# Altium PCB Percepção_Externa.PcbDoc
Units mm, origin at the board's own origin, x right, y up, seen from the top; angles counter-clockwise.
Board outline 65.15 x 120.02 mm, 2 copper layers (Top Layer, Bottom Layer); 28 components, 24 nets, 141 pads, 28 vias.
Unrouted connection lines stored in the file: 1.
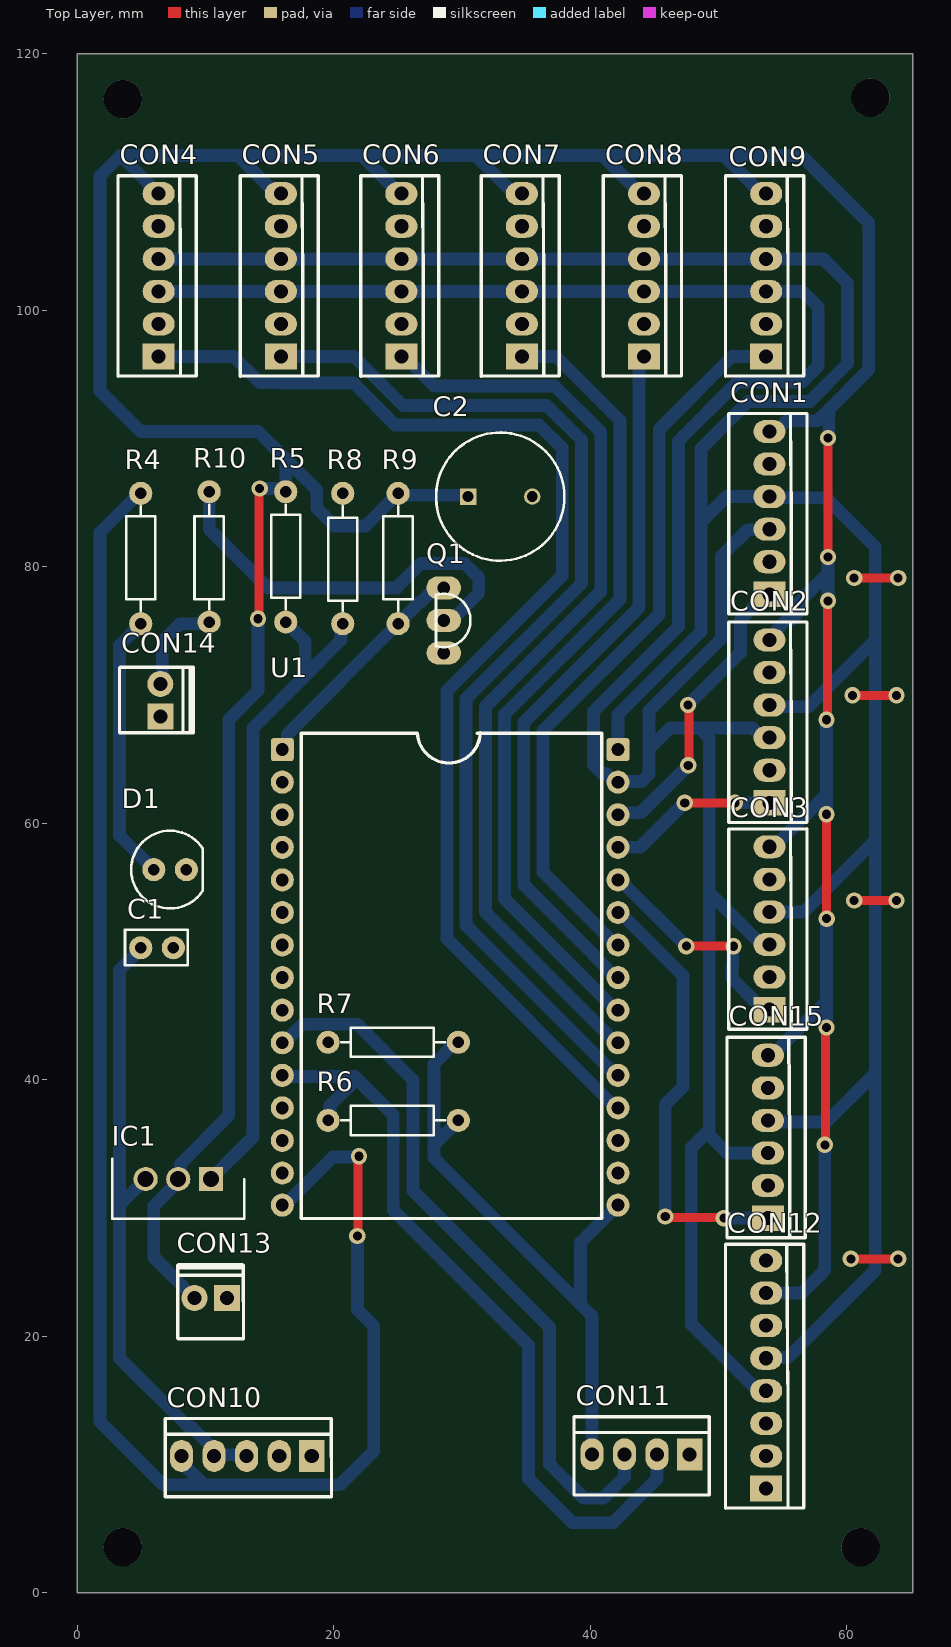
[diagram p0: Top Layer view]
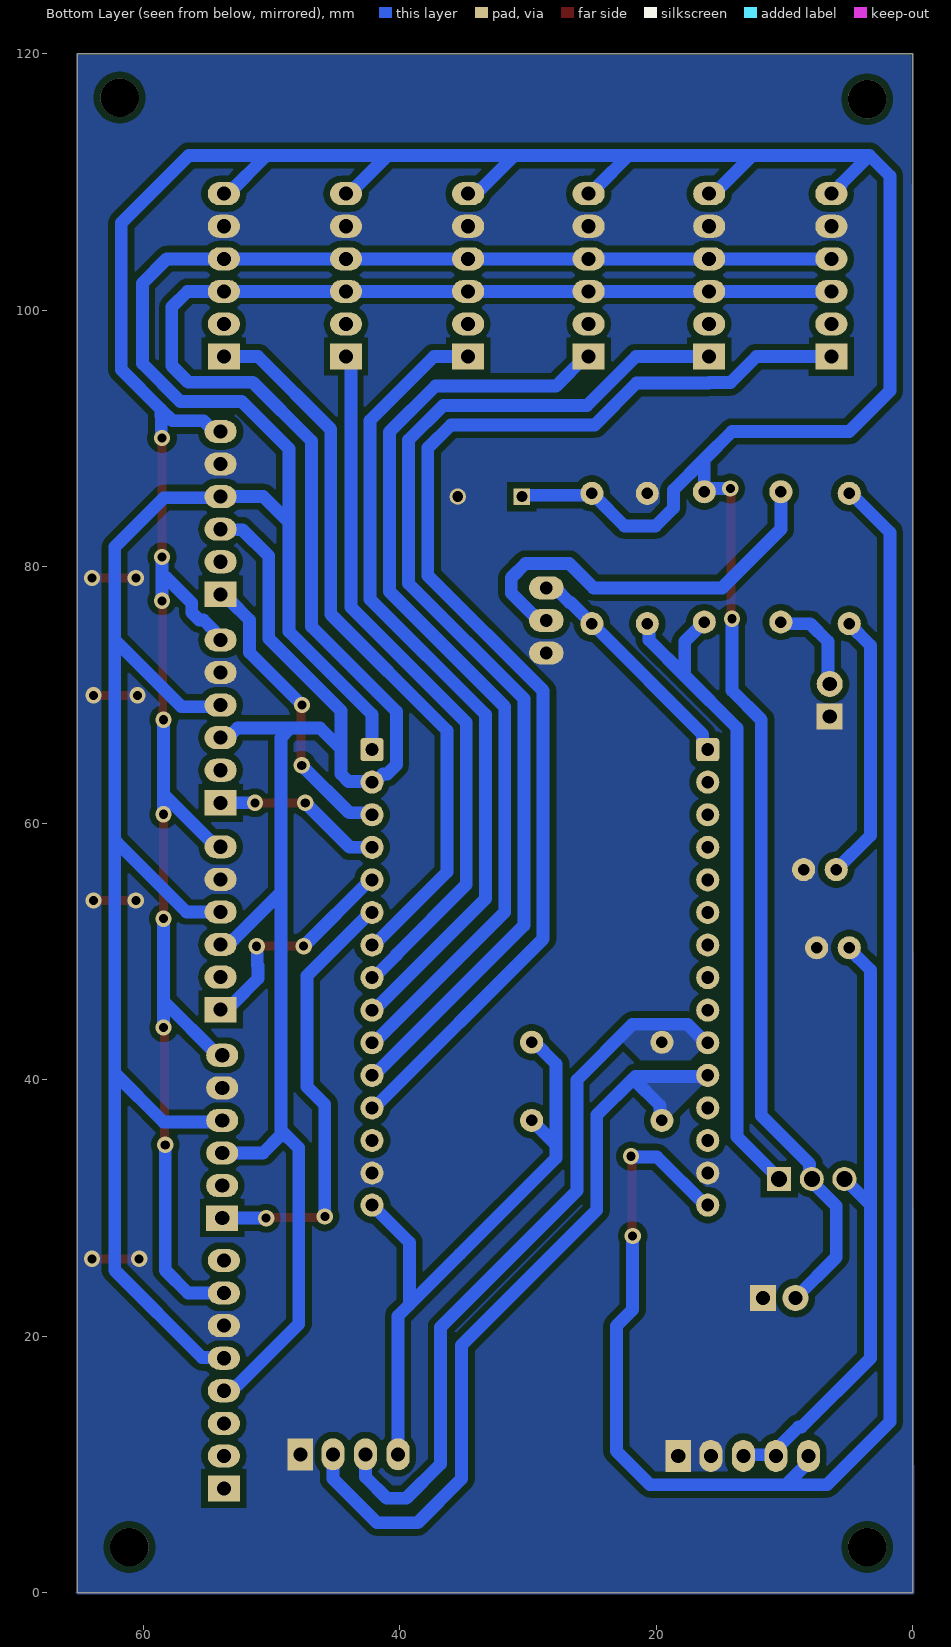
[diagram p1: Bottom Layer view, seen from below]

## Layer stack, top to bottom
Top Solder: solder mask 0.0102, Solder Resist, Dk 3.5
Top Layer: signal copper 0.0356
Dielectric 1: dielectric 0.32, FR-4, Dk 4.8
Bottom Layer: signal copper 0.0356
Bottom Solder: solder mask 0.0102, Solder Resist, Dk 3.5

## Board outline
0,0 65.151,0 65.151,120.015 0,120.015

## Design rules (kind name [scope] priority, off if disabled: settings)
Clearance [All] p1: gap=0.5 ignorepadtopadclearanceinfootprint=FALSE except(0: Arc-Text Arc-Hole Track-Text Track-Hole SMDPad-Text SMDPad-Hole THPad-Text THPad-Hole Via-Text Via-Hole Fill-Text Fill-Hole Poly-Text Poly-Hole Region-Text Region-Hole Text-Text Text-Hole)
ComponentClearance [All] p1: gap=0.3 collisioncheckmode=3 verticalgap=0.254 showdistances=FALSE
HoleSize [All] p1: absolutevalues=TRUE maxlimit=3 minlimit=0.75 maxpercent=80.000 minpercent=20.000
HoleToHoleClearance [All] p1: gap=0.1 allowstackedmicrovias=TRUE
MinimumSolderMaskSliver [All] p1: minsoldermaskwidth=0.05
PolygonConnect [All] p1: connectstyle=Relief reliefconductorwidth=0.254 reliefentries=4 polygonreliefangle="90 Angle" airgapwidth=0.254
RoutingVias [All] p1: holewidth=0.9 width=2 viastyle="Through Hole" minholewidth=0.9 minwidth=2 maxholewidth=0.9 maxwidth=2
SilkToSilkClearance [All] p1: silktosilkclearance=0
SilkToSolderMaskClearance [IsPad] p1: minsilkscreentomaskgap=0 clearancetoexposedcopper=TRUE
SolderMaskExpansion [All] p1: expansion=0.102 istentingtop=FALSE
Width [All] p1: maxlimit=1.2 minlimit=0.5 preferedwidth=0.7 minimp=50.000000 maximp=50.000000 favimp=50.000000
24 further rules are at their usual default settings.

## Classes and differential pairs
component class U_sensores: CON1 CON2 CON3 CON4 CON5 CON6 CON7 CON8 CON9 CON15
component class Percepção_Externa: C1 C2 CON10 CON11 CON12 CON13 CON14 D1 IC1 Q1 R4 R5 R6 R7 R8 R9 R10 U1

## Components (designator, comment, footprint, x,y, rotation, side; value= is the part's Value field where it differs from the comment)
C1 "100nF" "CAP CER DISK 100NF 50V" 6.223,50.292 r180 top
C2 "Cap. Elet. 1uF 50V" "Cap. Elet. 470uF 16V" 30.48,85.471 r0 top
CON1 "KK_2.54_6vias" KK_6vias_180° 53.975,77.851 r90 top
CON2 "KK_2.54_6vias" KK_6vias_180° 53.975,61.595 r90 top
CON3 "KK_2.54_6vias" KK_6vias_180° 53.975,45.466 r90 top
CON4 "KK_2.54_6vias" KK_6vias_180° 6.35,96.393 r90 top
CON5 "KK_2.54_6vias" KK_6vias_180° 15.875,96.393 r90 top
CON6 "KK_2.54_6vias" KK_6vias_180° 25.273,96.393 r90 top
CON7 "KK_2.54_6vias" KK_6vias_180° 34.671,96.393 r90 top
CON8 "KK_2.54_6vias" KK_6vias_180° 44.196,96.393 r90 top
CON9 "KK_2.54_6vias" KK_6vias_180° 53.721,96.393 r90 top
CON10 "KK_2.54_5vias" KK_5vias_180° 18.288,10.668 r180 top
CON11 "KK_2.54_4vias" KK_4vias_180° 47.752,10.795 r180 top
CON12 "KK_2.54_8vias" KK_8vias_180° 53.721,8.128 r90 top
CON13 "KK_2.54_2vias" KK_2VIAS_180º 11.684,22.987 r180 top
CON14 "KK_2.54_2vias" KK_2VIAS_180º 6.477,68.326 r90 top
CON15 "KK_2.54_6vias" KK_6vias_180° 53.848,29.21 r90 top
D1 "LED 5MM RED" "LED 5MM RED" 7.239,56.388 r0 top
IC1 "LM317" TO254P467X1016X1971-3P 10.414,32.258 r180 top
Q1 "BC549" TO92 28.575,75.819 r270 top
R4 "RES 470R 1/4W CARBON FILM" "RES 470R 1/4W CARBON FILM" 4.953,80.645 r90 top
R5 "RES 470R 1/4W CARBON FILM" "RES 470R 1/4W CARBON FILM" 16.256,80.772 r90 top
R6 "4.7K" "RES 4.7K 1/4W CARBON FILM" 24.638,36.83 r180 top
R7 "4.7K" "RES 4.7K 1/4W CARBON FILM" 24.638,42.926 r180 top
R8 "RES 470R 1/4W CARBON FILM" "RES 470R 1/4W CARBON FILM" 20.701,80.645 r270 top
R9 "RES 470R 1/4W CARBON FILM" "RES 470R 1/4W CARBON FILM" 25.019,80.645 r90 top
R10 "RES 470R 1/4W CARBON FILM" "RES 470R 1/4W CARBON FILM" 10.287,80.772 r270 top
U1 "microcontrolador" ESP32_Desvikit_v1 15.989,65.746 r0 top value="ESP32 Desvikit V1"

## Footprints (in the part's own frame and the unit in brackets; to place one, negate y for a bottom-side part, rotate by r counter-clockwise, add the part's x,y. Pads: shape width x height; smd on the part's side, far side on the other; paste and mask are expansions set on the pad)
"CAP CER DISK 100NF 50V" [mm] "Connector; Header; 5 Position"
  round 1.8 hole 0.9: 1(-1.27,0) 2(1.27,0)
  silkscreen extent -2.4,-1.4 2.5,1.37, body extent -2.28,-1.25 2.42,1.25, height 6.1
"Cap. Elet. 470uF 16V" [mm]
  rect 1.275x1.275 hole 0.85: 1(0,0)
  round 1.275 hole 0.85: 2(5,0)
  silkscreen extent -2.5,-5 7.5,5, body extent -2.75,-5.25 7.75,5.25, height 13
ESP32_Desvikit_v1 [mm]
  rrect25% 1.8x1.8 hole 1: 1(0,0) 30(26.175,0)
  round 1.8 hole 1: 2(0,-2.54) 3(0,-5.08) 4(0,-7.62) 5(0,-10.16) 6(0,-12.7) 7(0,-15.24) 8(0,-17.78) 9(0,-20.32) 10(0,-22.86) 11(0,-25.4) 12(0,-27.94) 13(0,-30.48) 14(0,-33.02) 15(0,-35.52) 16(26.175,-35.52) 17(26.175,-33.02) 18(26.175,-30.48) 19(26.175,-27.94) 20(26.175,-25.4) 21(26.175,-22.86) 22(26.175,-20.32) 23(26.175,-17.78) 24(26.175,-15.24) 25(26.175,-12.7) 26(26.175,-10.16) 27(26.175,-7.62) 28(26.175,-5.08) 29(26.175,-2.54)
  silkscreen extent 1.47,-36.57 24.9,1.31, body extent -1.2,-46.07 27.48,4.86, height 16.2
KK_2VIAS_180º [mil]
  rect 80x80 hole 43.31: 1(0,0)
  round 80 hole 43.31: 2(100,0)
  silkscreen extent -50,-101 151,125, body extent -61,-108 165,128, height 464
KK_4vias_180° [mm]
  rect 2x2.5 hole 1.1: 1(0,0)
  oval 1.8x2.5 hole 1.1: 2(2.54,0) 3(5.08,0) 4(7.62,0)
  silkscreen extent -1.53,-2.92 9.02,3.18, body extent -1.4,-2.79 8.76,3.01, height 10.12
KK_5vias_180° [mm]
  rect 2x2.5 hole 1.1: 1(0,0)
  oval 1.8x2.5 hole 1.1: 2(2.54,0) 3(5.08,0) 4(7.62,0) 5(10.16,0)
  silkscreen extent -1.53,-2.92 11.43,3.18, body extent -1.4,-2.79 11.3,3.01, height 10.12
KK_6vias_180° [mm]
  rect 2x2.5 hole 1.1: 1(0,0)
  oval 1.8x2.5 hole 1.1: 2(2.54,0) 3(5.08,0) 4(7.62,0) 5(10.16,0) 6(12.7,0)
  silkscreen extent -1.53,-2.92 14.11,3.18, body extent -1.4,-2.79 13.84,3.05, height 10.1
KK_8vias_180° [mm]
  rect 2x2.5 hole 1.1: 1(0,0)
  oval 1.8x2.5 hole 1.1: 2(2.54,0) 3(5.08,0) 4(7.62,0) 5(10.16,0) 6(12.7,0) 7(15.24,0) 8(17.78,0)
  silkscreen extent -1.53,-2.92 19.05,3.18, body extent -1.4,-2.74 18.92,3.1, height 10.1
"LED 5MM RED" [mm]
  round 1.8 hole 0.9: 1(-1.27,0) 2(1.27,0)
  silkscreen extent -3.03,-3.03 2.54,3.03, body extent -2.98,-3.01 2.44,3.01, height 9.31
"RES 4.7K 1/4W CARBON FILM" [mm]
  round 1.8 hole 0.9: 1(-5.08,0) 2(5.08,0)
  silkscreen extent -4.06,-1.14 4.06,1.14, body extent -5.47,-1.27 5.47,1.27, height 3.27
"RES 470R 1/4W CARBON FILM" [mm]
  round 1.8 hole 0.9: 1(-5.08,0) 2(5.08,0)
  silkscreen extent -4.06,-1.14 4.06,1.14, body extent -5.47,-1.27 5.47,1.27, height 3.27
TO92 [mm]
  oval 1.8x2.7 hole 1: 1(-2.54,0) 2(0,0) 3(2.54,0)
  silkscreen extent -2.09,-0.6 2.09,2.08, body extent -2.74,-0.57 2.74,2.04, height 6.83
TO254P467X1016X1971-3P [mm]
  rect 1.875x1.875 hole 1.25: 1(0,0)
  round 1.875 hole 1.25: 2(2.54,0) 3(5.08,0)
  silkscreen extent -2.62,-1.59 7.7,3.09, body extent 0,0 0,0

## Part data
C1: library part "CAP CER DISK 100NF 50V", "CAP CER DISK 100NF 50V", Capacitance=0.1uF, Capacitance Tolerance="+80%, -20%", Capacitor Terminals="Radial Leaded", Dielectric Characteristic=Y5, Manufacturer=-, Manufacturer Part Number=IMP14925, Operating Temperature Max=85, Operating Temperature Min=-25, Operating Temperature Range="-25°C to +85°C<!--FANDB--><div class=\"features-and-benefits-container\"><div class=\"features-and-benefits-description\"><span class=\"features-benefits-value\">The MCFY series from Multicomp are radial leaded ceramic disc capacitors. The capacitance values ranges from 6800pF to 0.22?F.</span></div><div class=\"features-and-benefits-list\"><ul class=\"features-and-benefits-list-list\"><li class=\"features-and-benefits-list-item\">Large capacitance in small size</li><li class=\"features-and-benefits-list-item\">Rated voltage of 50V</li><li class=\"features-and-benefits-list-item\">80%/-20% tolerance</li><li class=\"features-and-benefits-list-item\">Operating temperature range -25°C to +85", Supplier Part Number 1="Capacitor Cerâmico Disco 100Kpf/50V (104/100K/100nF/0.1uF) cód. 1351", Voltage Rating=50, Capacitance Tolerance ±="+80%, -20%", ComponentLink1Description=http://loja.multcomercial.com.br/capacitor-ceramico-disco-100kpf-50v-104-100k-100nf-0-1uf-cod-1351.html, ComponentLink1URL=http://loja.multcomercial.com.br/capacitor-ceramico-disco-100kpf-50v-104-100k-100nf-0-1uf-cod-1351.html, Lead Spacing=5, Packaging=Each, Pricing 1="1=0.10 (BRL)", Product Range="MCFY Series", RoHS=YES, Stock 1=115809, Supplier 1="Mult Comercial", SVHC="No SVHC (15-Jun-2015)"
C2: library part "Cap. Elet. 470 uF 16V", "Aluminum Organic Polymer Capacitors 16volts 470uF ESR 10mohm", Arrow Part Number=16SEPC470M, Manufacturer_Name=Panasonic, Mouser Part Number=667-16SEPC470M, Arrow Price/Stock=https://www.arrow.com/en/products/16sepc470m/panasonic, Datasheet Link=http://industrial.panasonic.com/www-cgi/jvcr13pz.cgi?E+CI+4+AAB8010+16SEPC470M+8+WW, Height=13mm, Manufacturer_Part_Number=16SEPC470M, Mouser Price/Stock=https://www.mouser.co.uk/ProductDetail/Panasonic/16SEPC470M?qs=OE1iw1LrrPEdZuWyF2l%252B5w%3D%3D
CON1 CON2 CON3 CON4 CON5 CON6 CON7 CON8 CON9 CON15: "Conector KK 2.54mm 6 vias", Descrição="Conector KK 3 vias com passo 2.54mm", Encapsulamento="PTH - 180º", Modelo="3 vias - 180º", Valor="KK 6 vias 180º"
CON10: "Conector KK 2.54mm 5 vias", Descrição="Conector KK 3 vias com passo 2.54mm", Encapsulamento="PTH - 180º", Modelo="3 vias - 180º", Valor="KK 5 vias 180º"
CON11: "Conector KK 2.54mm 4 vias", Descrição="Conector KK 3 vias com passo 2.54mm", Encapsulamento="PTH - 180º", Modelo="3 vias - 180º", Valor="KK 4 vias 180º"
CON12: "Conector KK 2.54mm 8 vias", Descrição="Conector KK 3 vias com passo 2.54mm", Encapsulamento="PTH - 180º", Modelo="3 vias - 180º", Valor="KK 8 vias 180º"
CON13 CON14: "Conector KK 2.54mm 2 vias", Descrição="Conector KK 3 vias com passo 2.54mm", Encapsulamento="PTH - 180º", Modelo="2 vias - 180º", Valor="KK 2 vias 180º"
D1: Current If Luminous Intensity=2, Forward Current If=20, Forward Voltage VF Max=2.5, LED Colour=Red, Manufacturer=Paralight, Manufacturer Part Number=IMP585, Operating Temperature Max=85, Operating Temperature Min=-40, Operating Temperature Range="-40°C to +85", Peak Forward Current=7, Supplier Part Number 1="Led 3mm Vermelho Difuso L-314HD - Paralight", Voltage Vf Typ="2.2V<!--FANDB--><div class=\"features-and-benefits-container\"><div class=\"features-and-benefits-description\"><span class=\"features-benefits-value\">The L-934LID from Kingbright is a through hole round shape high efficiency red colour LED. The device is made of gallium arsenide phosphide on gallium phosphide orange light emitting diode. This LED is widely used because of low power consumption, long life and solid state reliability.</span></div><div class=\"features-and-benefits-list\"><ul class=\"features-and-benefits-list-list\"><li class=\"features-and-benefits-list-item\">Standard bulb size of T-1 (3mm)</li><li class=\"features-and-benefits-list-item\">Reliable and rugged</li><li class=\"features-and-benefits-list-item\">Viewing angle is 60°</li><li class=\"features-and-benefits-list-item\">Luminous intensity of 3mcd at 2mA</li><li class=\"features-and-benefits-list-item\">Forward voltage is 2.0V</li><li class=\"features-and-benefits-list-item\">Forward current (If) is 20mA</li><li class=\"features-and-benefits-list-item\">Dominant wavelength is 625nm at IF=20mA</li><li class=\"features-and-benefits-list-item\">Peak wavelength is 627nm at IF=20", Bulb Size=3mm, ComponentLink1Description=http://loja.multcomercial.com.br/led-3mm-vermelho-difuso-l-314hd-paralight.html, ComponentLink1URL=http://loja.multcomercial.com.br/led-3mm-vermelho-difuso-l-314hd-paralight.html, Dominant Wavelength=625, External Diameter=2.9, External Length / Height=4.6, Forward Current If Max=20, Forward Voltage=2, Lead Cross-section Depth=0.5, Lead Cross-section Width=0.5, Lead Spacing=2.54, LED / Lamp Size="3mm / T-1", LED Mounting="Through Hole", LED Type=Standard, Lens Shape=Round, Luminous Intensity=3, Luminous Intensity @ If Min=0.7, Luminous Intensity Typ=3, Mounting Type="PCB Through Hole", MSL=-, No. of Pins=2, Packaging=Each, Peak Wavelength=625, PIV Max=5, Pricing 1="1=0.15 (BRL)", RoHS=YES, Stock 1=35260, Supplier 1="Mult Comercial", SVHC="No SVHC (15-Jun-2015)", Viewing Angle=60°, Wavelength Typ=625
IC1: "Integrated Circuit", Manufacturer_Name="Changjiang Electronics Tech (CJ)", Datasheet Link=https://datasheet.lcsc.com/szlcsc/Changjiang-Electronics-Tech-CJ-LM317_C22147.pdf, Height=4.67mm, Manufacturer_Part_Number=LM317
Q1: "TRANS NPN 30V 0.1A TO-92", Collector- Base Voltage VCBO="30 V", Collector-Emitter Saturation Voltage="200 mV", DC Current Gain hFE Max=800, Emitter- Base Voltage VEBO="5 V", Manufacturer="Fairchild Semiconductor", Maximum DC Collector Current="0.1 A", Maximum Operating Temperature="+ 150 C", Maximum Power Dissipation="0.5 W", Minimum Operating Temperature="- 65 C", Package / Case=TO-92-3, Supplier Part Number 1=512-BC549, Brand="Fairchild Semiconductor", Collector- Emitter Voltage VCEO Max="30 V", ComponentLink1Description=https://datasheet.ciiva.com/982/bc546-982130.pdf, ComponentLink1URL=https://datasheet.ciiva.com/982/bc546-982130.pdf, ComponentLink2Description=https://datasheet.ciiva.com/17179/bc549-17179663.pdf, ComponentLink2URL=https://datasheet.ciiva.com/17179/bc549-17179663.pdf, Configuration=Single, DC Collector/Base Gain hfe Min=110, Factory Pack Quantity=2000, Gain Bandwidth Product fT="300 MHz", Manufacturer Part Number=BC549, Mounting Style="Through Hole", Packaging=Bulk, Product Category="Bipolar Transistors - BJT", RoHS=Details, Series=BC549, Supplier 1=Mouser, Transistor Polarity=NPN
R4: "RES 470R OHM 1/4W 5% CARBON FILM", Manufacturer=Ty-Ohm, Manufacturer Part Number=CR25, Operating Temperature="-55°C ~ 155°C", Package / Case=Axial, Power (Watts)="0.25W, 1/4W", Resistance (Ohms)=910R, Supplier Part Number 1="Resistor de Filme de Carbono 1/4 de Watt CR25 5% de tolerância - 0.22R Ω à 10M Ω", Temperature Coefficient="0/ -500ppm/°C", Tolerance=±5%, Category=Resistors, ComponentLink1Description=http://loja.multcomercial.com.br/resistor-de-1-4-de-watt-cr25-5-de-tolerancia.html, ComponentLink1URL=http://loja.multcomercial.com.br/resistor-de-1-4-de-watt-cr25-5-de-tolerancia.html, Composition="Carbon Film", Features="Flame Retardant Coating, Safety", Height=-, Number of Terminations=2, Packaging="Cut Tape (CT)", Pricing 1="1=0.20 (BRL)", RoHS="RoHS Compliant", Size / Dimension="0.091\" Dia x 0.256\" L (2.30mm x 6.50mm)", Stock 1=617543, Supplier 1="Mult Comercial", Supplier Device Package=Axial
R5: "RES 470R OHM 1/4W 5% CARBON FILM", Manufacturer=Ty-Ohm, Manufacturer Part Number=CR25, Operating Temperature="-55°C ~ 155°C", Package / Case=Axial, Power (Watts)="0.25W, 1/4W", Resistance (Ohms)=240R, Supplier Part Number 1="Resistor de Filme de Carbono 1/4 de Watt CR25 5% de tolerância - 0.22R Ω à 10M Ω", Temperature Coefficient="0/ -500ppm/°C", Tolerance=±5%, Category=Resistors, ComponentLink1Description=http://loja.multcomercial.com.br/resistor-de-1-4-de-watt-cr25-5-de-tolerancia.html, ComponentLink1URL=http://loja.multcomercial.com.br/resistor-de-1-4-de-watt-cr25-5-de-tolerancia.html, Composition="Carbon Film", Features="Flame Retardant Coating, Safety", Height=-, Number of Terminations=2, Packaging="Cut Tape (CT)", Pricing 1="1=0.20 (BRL)", RoHS="RoHS Compliant", Size / Dimension="0.091\" Dia x 0.256\" L (2.30mm x 6.50mm)", Stock 1=617543, Supplier 1="Mult Comercial", Supplier Device Package=Axial
R6 R7: library part "RES 4.7K 1/4W CARBON FILM", "RES 4.7K OHM 1/4W 5% CARBON FILM", Manufacturer=Ty-Ohm, Manufacturer Part Number=CR25, Operating Temperature="-55°C ~ 155°C", Package / Case=Axial, Power (Watts)="0.25W, 1/4W", Resistance (Ohms)=?, Supplier Part Number 1="Resistor de Filme de Carbono 1/4 de Watt CR25 5% de tolerância - 0.22R Ω à 10M Ω", Temperature Coefficient="0/ -500ppm/°C", Tolerance=±5%, Category=Resistors, ComponentLink1Description=http://loja.multcomercial.com.br/resistor-de-1-4-de-watt-cr25-5-de-tolerancia.html, ComponentLink1URL=http://loja.multcomercial.com.br/resistor-de-1-4-de-watt-cr25-5-de-tolerancia.html, Composition="Carbon Film", Features="Flame Retardant Coating, Safety", Height=-, Number of Terminations=2, Packaging="Cut Tape (CT)", Pricing 1="1=0.20 (BRL)", RoHS="RoHS Compliant", Size / Dimension="0.091\" Dia x 0.256\" L (2.30mm x 6.50mm)", Stock 1=617543, Supplier 1="Mult Comercial", Supplier Device Package=Axial
R8: "RES 470R OHM 1/4W 5% CARBON FILM", Manufacturer=Ty-Ohm, Manufacturer Part Number=CR25, Operating Temperature="-55°C ~ 155°C", Package / Case=Axial, Power (Watts)="0.25W, 1/4W", Resistance (Ohms)=390R, Supplier Part Number 1="Resistor de Filme de Carbono 1/4 de Watt CR25 5% de tolerância - 0.22R Ω à 10M Ω", Temperature Coefficient="0/ -500ppm/°C", Tolerance=±5%, Category=Resistors, ComponentLink1Description=http://loja.multcomercial.com.br/resistor-de-1-4-de-watt-cr25-5-de-tolerancia.html, ComponentLink1URL=http://loja.multcomercial.com.br/resistor-de-1-4-de-watt-cr25-5-de-tolerancia.html, Composition="Carbon Film", Features="Flame Retardant Coating, Safety", Height=-, Number of Terminations=2, Packaging="Cut Tape (CT)", Pricing 1="1=0.20 (BRL)", RoHS="RoHS Compliant", Size / Dimension="0.091\" Dia x 0.256\" L (2.30mm x 6.50mm)", Stock 1=617543, Supplier 1="Mult Comercial", Supplier Device Package=Axial
R9 R10: "RES 470R OHM 1/4W 5% CARBON FILM", Manufacturer=Ty-Ohm, Manufacturer Part Number=CR25, Operating Temperature="-55°C ~ 155°C", Package / Case=Axial, Power (Watts)="0.25W, 1/4W", Resistance (Ohms)=2200R, Supplier Part Number 1="Resistor de Filme de Carbono 1/4 de Watt CR25 5% de tolerância - 0.22R Ω à 10M Ω", Temperature Coefficient="0/ -500ppm/°C", Tolerance=±5%, Category=Resistors, ComponentLink1Description=http://loja.multcomercial.com.br/resistor-de-1-4-de-watt-cr25-5-de-tolerancia.html, ComponentLink1URL=http://loja.multcomercial.com.br/resistor-de-1-4-de-watt-cr25-5-de-tolerancia.html, Composition="Carbon Film", Features="Flame Retardant Coating, Safety", Height=-, Number of Terminations=2, Packaging="Cut Tape (CT)", Pricing 1="1=0.20 (BRL)", RoHS="RoHS Compliant", Size / Dimension="0.091\" Dia x 0.256\" L (2.30mm x 6.50mm)", Stock 1=617543, Supplier 1="Mult Comercial", Supplier Device Package=Axial
U1: library part "ESP32 Desvikit v1", "microcontrolador com moculo bluethoth e wifi"

## Free pads (board coordinates)
  round 3 hole 3: 6(3.556,116.459) 6(61.849,116.586) 7(61.087,3.556) 8(3.556,3.556)

## Via types
v1: diameter 1.27, hole 0.711, Top Layer to Bottom Layer, 28 vias

## Nets (pads, with @x,y where several pads share a name; then routed paths per layer and width w, separated by ;. In a path a pad name is that pad's centre, name@x,y a point inside that pad or via, vN(x,y) a via of type N, cw(c..) or ccw(c..) an arc to the next point about the centre after c; other vN are vias at no path point)
3V3: C2.1 CON1.6 CON2.6 CON3.6 CON4.6 CON5.6 CON6.6 CON7.6 CON8.6 CON9.6 CON12.7 CON13.2 CON15.6 IC1.2 R5.2 R9.2 | length 327.3
  Top Layer w0.7: v1(14.097,75.946) 14.16,76.01 14.16,86.042 v1(14.224,86.106) ; v1(58.293,34.925) 58.356,34.989 58.356,44.005 v1(58.42,44.069) ; v1(58.42,60.706) 58.42,52.578 v1(58.433,52.565) ; v1(58.42,68.072) 58.483,68.135 58.483,77.279 v1(58.547,77.343) ; v1(58.547,80.772) v1(58.547,90.043)
  Bottom Layer w1: CON4.6 6.216,109.093 5.6,109.709 5.6,109.843 3.37,112.073 ; CON13.2 5.969,26.162 5.969,30.153 7.874,32.058 IC1.2 8.041,32.425 8.041,33.441 11.811,37.211 11.811,68.072 14.097,70.358 v1(14.097,75.946) ; v1(14.224,86.106) 16.002,86.106 R5.2 16.256,88.392 ; CON5.6 15.494,109.093 12.514,112.073 ; 22.204,112.035 24.523,109.716 24.523,109.709 25.139,109.093 CON6.6 ; R9.2 R9.2@24.866,85.572 ; C2.1 30.379,85.572 R9.2@24.866,85.572 ; CON7.6 34.105,109.093 33.705,109.493 33.636,109.493 31.056,112.073 ; 41.021,112.014 43.942,109.093 CON8.6 ; CON12.7 56.515,23.368 58.293,25.146 v1(58.293,34.925) ; CON9.6 53.371,109.093 50.391,112.073 ; CON15.6 54.198,41.91 58.42,46.132 ; CON3.6 54.325,58.166 58.42,62.261 ; CON2.6 54.109,74.295 54.478,74.665 54.478,75.018 55.311,75.851 55.639,75.851 56.225,76.437 56.225,77.18 58.213,79.168 ; CON1.6 54.469,90.551 55.311,91.393 57.738,91.393 58.61,92.266 ; v1(58.42,44.069) 58.42,46.132 ; v1(58.42,60.706) 58.42,62.261 ; v1(58.42,68.072) 58.42,62.261 ; v1(58.433,52.565) 58.42,52.552 58.42,46.132 ; v1(58.547,77.343) v1(58.547,80.772) ; v1(58.547,90.043) 58.599,90.095 58.599,91.746 58.61,91.757 58.61,92.266 ; 3.37,112.073 12.514,112.073 ; 3.37,112.073 1.778,110.481 1.778,93.726 4.953,90.551 14.097,90.551 16.256,88.392 ; 12.514,112.073 31.056,112.073 ; 16.256,88.392 18.669,85.979 18.669,84.582 20.066,83.185 22.479,83.185 R9.2@24.866,85.572 ; 31.056,112.073 50.391,112.073 ; 50.391,112.073 56.456,112.073 61.722,106.807 61.722,95.377 58.61,92.266
3V3p: CON11.4 R6.1 R7.1 U1.16 | length 49.8
  Bottom Layer w1: R6.1 27.813,34.925 ; R7.1 29.502,42.926 27.813,41.237 27.813,34.925 ; CON11.4 40.132,21.59 39.243,22.479 ; U1.16 39.243,27.305 39.243,22.479 ; 27.813,34.925 27.813,33.909 35.306,26.416 39.243,22.479
+5: C1.2 CON10.3 CON10.4 IC1.3 | length 49
  Bottom Layer w1: C1.2 4.953,50.2 3.302,48.549 3.302,30.226 ; IC1.3 3.302,30.226 ; CON10.4 10.668,11.165 8.915,12.918 8.672,12.918 3.302,18.288 3.302,30.226 ; CON10.4@10.755,10.755 CON10.3@13.121,10.755
  Bottom Layer w1.5: CON10.4 CON10.4@10.755,10.755 ; CON10.3@13.121,10.755 CON10.3
+12: CON10.5 R4.2 U1.15 | length 132.2
  Top Layer w0.7: v1(21.844,27.813) 21.907,27.877 21.907,33.972 v1(21.971,34.036)
  Bottom Layer w1: R4.2@4.811,85.71 1.778,82.677 1.778,13.335 6.695,8.418 9.881,8.418 ; CON10.5 8.128,10.171 9.881,8.418 ; U1.15 16.176,30.226 19.934,33.984 21.919,33.984 v1(21.971,34.036) ; v1(21.844,27.813) 21.844,22.061 23.114,20.791 23.114,11.049 20.483,8.418 9.881,8.418
en: Q1.1 R9.1 U1.1 | length 18.3
  Bottom Layer w1: U1.1 16.389,66.146 16.389,66.935 R9.1@24.866,75.412 ; R9.1 26.67,77.216 26.766,77.216 27.909,78.359 Q1.1 Q1.1@28.422,78.206
GND: C1.1 C2.2 CON1.5 CON2.5 CON3.5 CON4.5 CON5.5 CON6.5 CON7.5 CON8.5 CON9.5 CON10.1 CON10.2 CON11.1 CON12.6 CON13.1 CON14.1 CON15.5 D1.2 Q1.3 R8.1 U1.14 U1.17 | length 13.8
  Top Layer w0.7: v1(60.325,26.035) v1(64.008,26.035) ; v1(60.452,69.977) v1(63.881,69.977) ; v1(60.579,53.975) v1(63.881,53.975) ; v1(60.579,79.121) v1(64.008,79.121)
NetCON14_2: CON14.2 R10.2 | length 7.7
  Bottom Layer w1: CON14.2 6.621,71.01 6.621,74.185 8.001,75.565 10.16,75.565 R10.2
NetD1_1: D1.1 R4.1 | length 21
  Bottom Layer w1: R4.1 4.953,75.521 3.302,73.87 3.302,59.055 D1.1
NetIC1_1: IC1.1 R5.1 R8.2 | length 52.4
  Bottom Layer w1: IC1.1 13.716,35.56 13.716,67.437 17.78,71.501 ; R5.1 17.78,74.168 17.78,71.501 ; R8.2 20.575,75.439 20.575,74.296 17.78,71.501
NetQ1_2: Q1.2 R10.1 | length 31.3
  Bottom Layer w1: R10.1 10.287,82.931 14.859,78.359 24.892,78.359 26.792,80.259 30.193,80.259 31.306,79.146 31.306,77.953 Q1.2@29.172,75.819
SCL: CON1.4 CON2.4 CON3.4 CON4.4 CON5.4 CON6.4 CON7.4 CON8.4 CON9.4 CON12.5 CON15.4 U1.30 | length 215.4
  Bottom Layer w1: CON4.4 CON5.4 CON6.4 CON7.4 CON8.4 CON9.4 58.166,104.013 60.071,102.108 60.071,95.847 57.117,92.893 52.324,92.893 48.641,89.21 48.641,83.552 48.641,74.956 42.164,68.479 U1.30 ; 48.725,83.552 50.644,85.471 CON1.4 ; CON12.5 53.768,18.335 55.419,18.335 62.23,25.146 62.23,40.513 ; CON15.4 53.975,36.703 58.42,36.703 62.23,40.513 ; CON3.4 56.642,53.086 62.015,58.459 ; CON2.4 54.102,69.088 57.023,69.088 62.186,74.251 ; CON1.4@54.019,85.388 58.376,85.388 62.23,81.534 62.23,74.251 62.23,58.459 62.23,40.513
SCL_IN: CON11.2 R6.2 U1.11 | length 61.6
  Bottom Layer w1: U1.11 16.076,40.259 21.628,40.259 21.799,40.087 ; R6.2 19.711,36.983 19.711,37.999 21.799,40.087 ; CON11.2 45.212,8.89 41.783,5.461 38.608,5.461 35.179,8.89 35.179,19.304 24.638,29.845 24.638,37.249 21.799,40.087
SDA: CON1.3 CON2.3 CON3.3 CON4.3 CON5.3 CON6.3 CON7.3 CON8.3 CON9.3 CON12.4 CON15.3 U1.29 | length 204.6
  Bottom Layer w0.7: U1.29 U1.29@42.462,63.206
  Bottom Layer w1: CON4.3 CON5.3 CON6.3 CON7.3 CON8.3 CON9.3 56.564,101.473 57.785,100.252 57.785,95.683 56.495,94.393 51.467,94.393 46.887,89.813 46.887,75.335 40.264,68.712 40.264,64.564 40.982,63.846 41.308,63.846 41.948,63.206 U1.29 ; U1.29@42.462,63.206 42.502,63.246 43.991,63.246 44.577,63.832 44.577,65.786 ; 49.276,36.068 47.879,34.671 47.879,20.955 52.686,16.148 52.755,16.148 53.155,15.748 CON12.4 ; CON15.3 50.673,34.29 49.276,35.687 49.276,54.61 ; CON3.3 53.409,50.546 53.009,50.946 52.94,50.946 49.276,54.61 ; CON2.3 53.409,66.675 52.647,67.437 48.514,67.437 ; CON1.3 53.928,82.884 52.277,82.884 50.225,80.832 50.225,74.419 44.577,68.771 44.577,65.786 ; 44.577,65.786 46.228,67.437 48.514,67.437 ; 48.514,67.437 49.276,66.675 49.276,54.61
SDA_IN: CON11.3 R7.2 U1.10 | length 56.4
  Bottom Layer w1: U1.10 16.136,42.886 17.573,44.323 21.844,44.323 26.186,39.981 26.186,31.345 36.83,20.701 36.83,10.033 39.497,7.366 41.021,7.366 42.672,9.017 CON11.3
xshunt1: CON4.1 U1.19 | length 95.2
  Bottom Layer w1: CON4.1 12.192,96.393 14.224,94.361 15.87,94.361 15.905,94.326 21.536,94.326 24.803,91.059 36.016,91.059 37.815,89.26 37.815,79.329 28.822,70.336 28.822,51.001 42.017,37.806 U1.19
xshunt2: CON5.1 U1.20 | length 84.4
  Bottom Layer w1: CON5.1 21.59,96.393 25.4,92.583 36.614,92.583 39.315,89.882 39.315,78.707 30.322,69.714 30.322,52.041 42.017,40.346 U1.20
xshunt3: CON6.1 U1.21 | length 73.7
  Bottom Layer w1: CON6.1 25.523,96.393 27.809,94.107 37.211,94.107 40.815,90.503 40.815,78.086 31.822,69.093 31.822,53.081 40.264,44.639 42.017,42.886 U1.21
xshunt4: CON7.1 U1.22 | length 63.2
  Bottom Layer w1: CON7.1 37.338,96.393 42.315,91.416 42.315,77.465 33.322,68.472 33.322,54.121 42.017,45.426 U1.22
xshunt5: CON8.1 U1.23 | length 55.4
  Bottom Layer w1: U1.23 42.017,47.966 40.264,49.719 40.264,49.779 34.822,55.221 34.822,67.85 43.815,76.843 43.815,96.012 CON8.1
xshunt6: CON9.1 U1.24 | length 57.2
  Bottom Layer w1: U1.24 42.017,50.506 36.322,56.201 36.322,67.229 45.387,76.294 45.387,90.726 51.054,96.393 CON9.1
xshunt7: CON1.1 U1.28 | length 23.2
  Top Layer w0.7: v1(47.625,69.215) 47.688,69.151 47.688,64.564 v1(47.641,64.516)
  Bottom Layer w1: U1.28 42.317,60.819 43.944,60.819 v1(47.641,64.516) ; v1(47.625,69.215) 51.725,73.315 51.725,75.851 53.225,77.351 53.725,77.851 CON1.1
xshunt8: CON2.1 U1.27 | length 13.2
  Top Layer w0.7: v1(47.371,61.595) v1(51.292,61.595)
  Bottom Layer w1: U1.27 43.902,58.126 v1(47.371,61.595) ; v1(51.292,61.595) CON2.1
xshunt9: CON3.1 U1.26 | length 17.6
  Top Layer w0.7: v1(47.498,50.419) 47.503,50.414 51.16,50.414 v1(51.165,50.409)
  Bottom Layer w1: U1.26 42.331,55.586 v1(47.498,50.419) ; v1(51.165,50.409) 51.113,50.357 51.113,48.949 51.054,48.89 51.054,47.89 52.978,45.966 53.475,45.966 CON3.1
xshunt10: CON15.1 U1.25 | length 34.5
  Top Layer w0.7: v1(45.847,29.337) 45.91,29.273 50.355,29.273 v1(50.419,29.21)
  Bottom Layer w1: U1.25 42.311,53.046 47.244,48.113 47.244,39.46 45.847,38.063 v1(45.847,29.337) ; v1(50.419,29.21) CON15.1
pads on no net: CON1.2 CON2.2 CON3.2 CON4.2 CON5.2 CON6.2 CON7.2 CON8.2 CON9.2 CON12.1 CON12.2 CON12.3 CON12.8 CON15.2 U1.2 U1.3 U1.4 U1.5 U1.6 U1.7 U1.8 U1.9 U1.12 U1.13 U1.18

## Polygon pours and split planes (outlines as drawn)
GND on Bottom Layer "GND_L02_P006" (solid, pour order 6): -0.127,-0.127 65.151,-0.127 65.278,0 65.151,0.127 65.151,119.888 0.254,119.888 0.127,120.015
SCL_IN on Bottom Layer "SCL_IN_L02_P003" (solid, pour order 3): 19.558,36.449 15.704,40.303 21.584,40.303 21.628,40.259 19.558,38.189
SDA_IN on Bottom Layer "SDA_IN_L02_P002" (solid, pour order 2): 15.989,42.886 17.346,41.529 21.209,41.529 22.606,42.926 22.606,43.561 15.849,43.561
SDA_IN on Bottom Layer "SDA_IN_L02_P001" (solid, pour order 1): 19.518,42.886 23.281,42.886 21.463,44.704 17.807,44.704 15.989,42.886

## Text inside footprints (layer, text, board x,y; h text height)
C1: Mechanical 29 "1" at 6.623,51.392 h0.5 r180
D1: Mechanical 29 "K" at 7.874,54.864 h0.5; Mechanical 29 "A" at 6.096,54.864 h0.5
Q1: Mechanical 29 "1" at 29.975,79.019 h0.5 r270
R4: Mechanical 29 "1" at 5.969,76.708 h0.5 r90
R5: Mechanical 29 "1" at 17.272,76.835 h0.5 r90
R6: Mechanical 29 "1" at 28.575,37.846 h0.5 r180
R7: Mechanical 29 "1" at 28.575,43.942 h0.5 r180
R8: Mechanical 29 "1" at 19.685,84.582 h0.5 r270
R9: Mechanical 29 "1" at 26.035,76.708 h0.5 r90
R10: Mechanical 29 "1" at 9.271,84.709 h0.5 r270